# Altium PCB Copy of BabyConditionMonitor.PcbDoc
Units mm, origin at the board's own origin, x right, y up, seen from the top; angles counter-clockwise.
Board outline 40.15 x 20.15 mm, 2 copper layers (Top Layer, Bottom Layer), stack 0.791 mm thick; 50 components, 43 nets, 234 pads, 28 vias.
Unrouted connection lines stored in the file: 60.
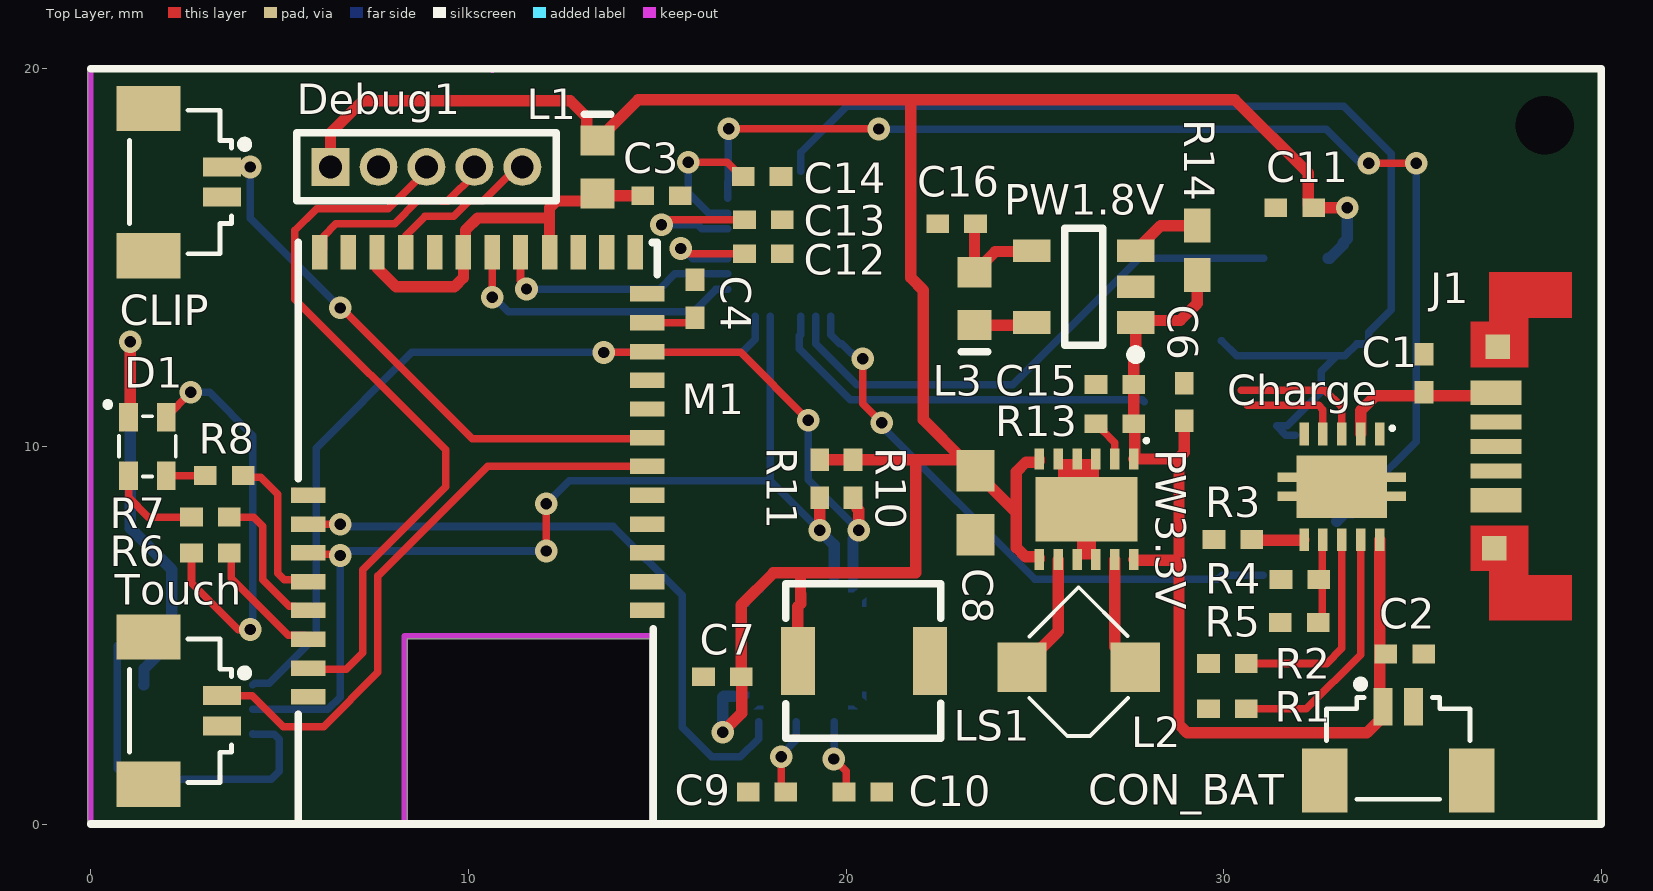
[diagram p0: Top Layer view]
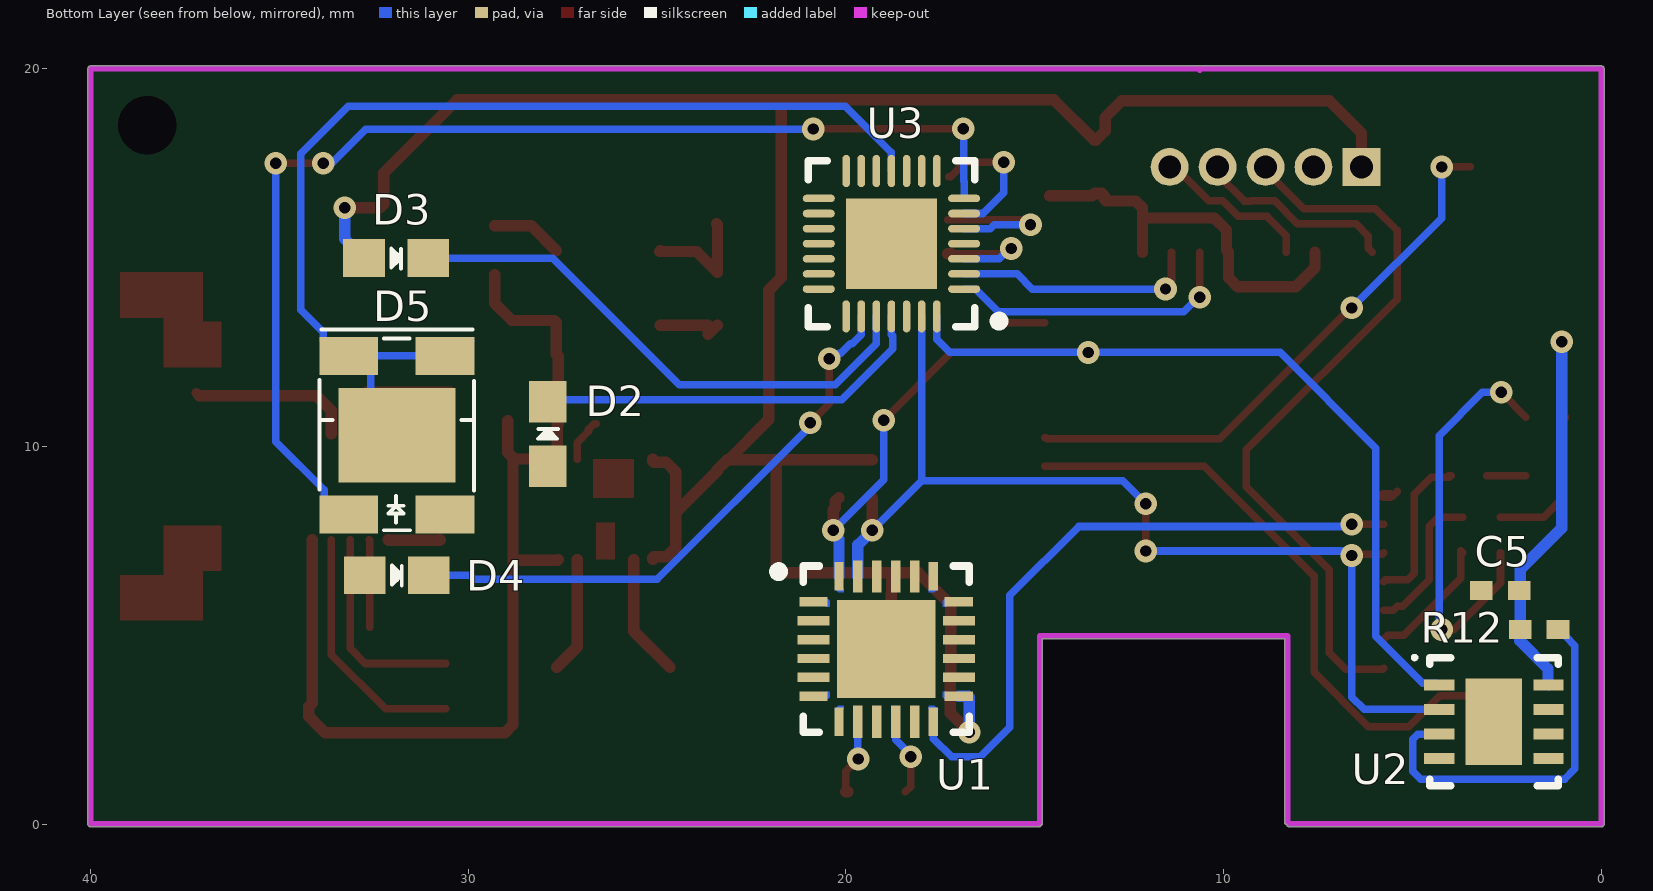
[diagram p1: Bottom Layer view, seen from below]

## Layer stack, top to bottom
Top Solder: solder mask 0.0102, Solder Resist, Dk 3.5
Top Layer: signal copper 0.0356
Dielectric 1: dielectric 0.72, FR-4, Dk 4.8
Bottom Layer: signal copper 0.0356
Bottom Solder: solder mask 0.0102, Solder Resist, Dk 3.5

## Board outline
0,-0.075 8.255,-0.075 ccw(c8.255,0) 8.328,-0.018 ccw(c8.31,0.055) 8.385,0.055 8.385,4.905 14.798,4.905 14.798,0.027 ccw(c14.873,0.027) 14.835,-0.038 ccw(c14.9,0) 14.9,-0.075 40,-0.075 ccw(c40,0) 40.075,0 40.075,20 ccw(c40,20) 40,20.075 0,20.075 ccw(c0,20) -0.075,20 -0.075,0 ccw(c0,0)

## Design rules (kind name [scope] priority, off if disabled: settings)
Clearance [All] p1: gap=0.2 ignorepadtopadclearanceinfootprint=FALSE
PolygonConnect [All] p1: connectstyle=Relief reliefconductorwidth=0.254 reliefentries=4 polygonreliefangle="90 Angle" airgapwidth=0.254
RoomDefinition BabyConditionMonitor [InComponentClass('BabyConditionMonitor')] p1: confinementstyle=ConfineOut formatcopy=TRUE lockcomponents=FALSE outline -17.907,-42.545 192.024,-42.545 192.024,-23.622 -17.907,-23.622
RoutingVias [All] p1: holewidth=0.711 width=1.27 viastyle="Through Hole" minholewidth=0.3 minwidth=0.3 maxholewidth=0.711 maxwidth=1.27
SolderMaskExpansion [All] p1: expansion=0.102
Width [All] p1: maxlimit=0.3 minlimit=0.2 preferedwidth=0.254
30 further rules are at their usual default settings.

## Components (designator, comment, footprint, x,y, rotation, side; value= is the part's Value field where it differs from the comment)
C1 "Cap" "1005[0402] High Density" 35.306,11.938 r90 top value=1uF
C2 "Cap" "1005[0402] High Density" 34.798,4.5 r0 top value=1uF
C3 "Cap" "1005[0402] High Density" 15.113,16.637 r180 top value=1uF
C4 "Cap" "1005[0402] High Density" 16.006,13.911 r270 top value=1uF
C5 "Cap" "1005[0402] High Density" 2.675,6.183 r180 bottom value=0.1uF
C6 "Cap" "1005[0402] High Density" 28.956,11.176 r270 top value=10uF
C7 "Cap" "1005[0402] High Density" 16.726,3.9 r0 top value=0.1uF
C8 "Cap" 1608[0603] 23.429,8.509 r270 top value=22uF
C9 "Cap" "1005[0402] High Density" 17.907,0.85 r0 top value=0.47uF
C10 "Cap" "1005[0402] High Density" 20.447,0.85 r180 top value=0.01uF
C11 "Cap" "1005[0402] High Density" 31.885,16.32 r0 top value=1uF
C12 "Cap" "1005[0402] High Density" 17.81,15.1 r180 top value=0.1uF
C13 "Cap" "1005[0402] High Density" 17.81,16.002 r180 top value=1uF
C14 "Cap" "1005[0402] High Density" 17.78,17.145 r180 top value=0.1uF
C15 "Cap" "1005[0402] High Density" 27.119,11.638 r0 top value=4.7uF
C16 "Cap" "1005[0402] High Density" 22.929,15.896 r0 top value=10uF
Charge "USB Charger" BQ24020 33.131,8.93 r270 top
CLIP "SM02B-SURS-TF" SM02B-SURS-TF 2.5,17 r270 top locked
CON_BAT "SM02B-SURS-TF" SM02B-SURS-TF 34.625,2.128 r0 top
D1 "FullColorLED" "fullColorLED SMT" 1.5,10 r90 top locked
D2 "LED" "1608[0603] -LED" 27.9,10.33 r90 bottom locked
D3 "LED" "1608[0603] -LED" 31.914,14.986 r180 bottom locked
D4 "LED" "1608[0603] -LED" 31.894,6.59 r180 bottom locked
D5 "VEMD5010X01" "OPT Sensor VEMD5010X01" 31.894,10.295 r180 bottom locked
Debug1 "Header 5" MHDR1X5 6.35,17.4 r0 top
J1 "USB 2.0 CON" "MicroUSB WaterProof" 37.211,10 r270 top locked
L1 "Inductor" INDC1608L 13.413,17.4 r270 top value=300Ohm100MHz
L2 "PowerInductor" Powerinductor 26.162,4.15 r225 top value=2.2uH
L3 "Inductor" INDC1608L 23.404,13.911 r90 top value=2.2uH
LS1 "Buzzer" ST-0402T 18.725,4.318 r0 top
M1 "CYBLE-224110-00" CYBLE-224110-00 5.5,0 r180 top locked
PW1.8V "LM3671" "LM3671 SOT" 26.296,14.23 r180 top
PW3.3V "Buck Boost Converter" RP604x 26.369,8.336 r270 top
R1 "Res3" "1005[0402] High Density" 30.098,3.053 r0 top value=10K
R2 "Res3" "1005[0402] High Density" 30.099,4.25 r0 top value=100K
R3 "Res3" "1005[0402] High Density" 30.244,7.53 r0 top value=10K
R4 "Res3" "1005[0402] High Density" 32.021,6.477 r180 top value=100K(DNI)
R5 "Res3" "1005[0402] High Density" 32.004,5.334 r0 top value=100K
R6 "Res3" "1005[0402] High Density" 3.167,7.18 r0 top value=330
R7 "Res3" "1005[0402] High Density" 3.167,8.128 r0 top value=330
R8 "Res3" "1005[0402] High Density" 3.536,9.225 r0 top value=330
R10 "Res3" "1005[0402] High Density" 20.185,9.144 r270 top value=4.7K
R11 "Res3" "1005[0402] High Density" 19.304,9.144 r270 top value=4.7K
R12 "Res Semi" "1005[0402] High Density" 1.644,5.15 r180 bottom value=4.7K
R13 "Res3" "1005[0402] High Density" 27.119,10.6 r0 top value=100K
R14 "" 1005[0402] 29.306,15.195 r270 top value=10K
Touch "SM02B-SURS-TF" SM02B-SURS-TF 2.5,3 r270 top locked
U1 "Accel Gyro Sensor" MPU-6050 18.935,4.633 r180 bottom locked
U2 "Body Temperature Sensor" MAX30205 2.842,2.708 r180 bottom
U3 "HRM AFE" ADPD1080 18.796,15.367 r0 bottom locked

## Footprints (in the part's own frame and the unit in brackets; to place one, negate y for a bottom-side part, rotate by r counter-clockwise, add the part's x,y. Pads: shape width x height; smd on the part's side, far side on the other; paste and mask are expansions set on the pad)
1005[0402] [mm] "Chip Resistor; Body 1.1 x 0.5 mm (LxW typ)"
  rect 0.9x0.7 smd: 1(-0.65,0) 2(0.65,0)
  body extent -0.64,-0.24 0.64,0.26, height 0.3
"1005[0402] High Density" [mm] "Chip Body 1.0x0.5mm, IPC High Density"
  rect 0.6x0.5 smd: 1(-0.5,0) 2(0.5,0)
  body extent -0.68,-0.25 0.6,0.25, height 0.3
1608[0603] [mm] "Chip Capacitor; Body 1.6 x 0.8 mm (LxW typ)"
  rect 1.1x1 smd: 1(-0.85,0) 2(0.85,0)
"1608[0603] -LED" [mm] "Chip Capacitor; Body 1.6 x 0.8 mm (LxW typ)"
  rect 1.1x1 smd: 1(-0.85,0) 2(0.85,0)
  silkscreen extent -0.13,-0.28 0.13,0.25, body extent -1.08,-0.42 1.05,0.41, height 0.6
ADPD1080 [mm] "QFN, 28-Leads, Body 4.00x4.00mm, Pitch 0.40mm, Thermal Pad 2.60x2.60mm, IPC Medium Density"
  oval 0.85x0.2 smd: 1(-1.925,1.2) 2(-1.925,0.8) 3(-1.925,0.4) 4(-1.925,0) 5(-1.925,-0.4) 6(-1.925,-0.8) 7(-1.925,-1.2) 15(1.925,-1.2) 16(1.925,-0.8) 17(1.925,-0.4) 18(1.925,0) 19(1.925,0.4) 20(1.925,0.8) 21(1.925,1.2)
  oval 0.2x0.85 smd: 8(-1.2,-1.925) 9(-0.8,-1.925) 10(-0.4,-1.925) 11(0,-1.925) 12(0.4,-1.925) 13(0.8,-1.925) 14(1.2,-1.925) 22(1.2,1.925) 23(0.8,1.925) 24(0.4,1.925) 25(0,1.925) 26(-0.4,1.925) 27(-0.8,1.925) 28(-1.2,1.925)
  rect 2.4x2.4 smd: 29(0,0)
  silkscreen extent -2.97,-2.2 2.2,2.2, body extent -2.07,-2.07 2.07,2.07, height 0.8
BQ24020 [mm] "BATTERY CHARGER"
  rect 0.6x0.25 smd: 1(-1.4,1) 2(-1.4,0.5) 3(-1.4,0) 4(-1.4,-0.5) 5(-1.4,-1) 6(1.4,-1) 7(1.4,-0.5) 8(1.4,0) 9(1.4,0.5) 10(1.4,1)
  rect 0.25x1 smd: 11(-0.25,1.2) 11(-0.25,-1.2) 11(0.25,1.2) 11(0.25,-1.2)
  rect 1.65x2.4 smd: 11(0,0)
  silkscreen extent -1.6,1.29 -1.5,1.39, body extent -1.05,-1.05 1.05,1.05, height 1
CYBLE-224110-00 [mm]
  rect 0.91x0.41 smd: 1(-0.26,-3.37) 2(-0.26,-4.13) 3(-0.26,-4.89) 4(-0.26,-5.66) 5(-0.26,-6.42) 6(-0.26,-7.18) 7(-0.26,-7.94) 8(-0.26,-8.7) 21(-9.24,-14.04) 22(-9.24,-13.28) 23(-9.24,-12.51) 24(-9.24,-11.75) 25(-9.24,-10.99) 26(-9.24,-10.23) 27(-9.24,-9.47) 28(-9.24,-8.7) 29(-9.24,-7.94) 30(-9.24,-7.18) 31(-9.24,-6.42) 32(-9.24,-5.66)
  rect 0.41x0.91 smd: 9(-0.56,-15.14) 10(-1.32,-15.14) 11(-2.08,-15.14) 12(-2.84,-15.14) 13(-3.61,-15.14) 14(-4.37,-15.14) 15(-5.13,-15.14) 16(-5.88,-15.14) 17(-6.65,-15.14) 18(-7.41,-15.14) 19(-8.17,-15.14) 20(-8.92,-15.14)
  silkscreen extent -9.5,-15.4 0,0, body extent -9.5,-15.41 0,-0.02, height 3.75
"fullColorLED SMT" [mm] "OSTB0603C1C-A"
  rect 0.75x0.5 smd: 1(0.775,0.5) 2(0.775,-0.5) 3(-0.775,0.5) 4(-0.775,-0.5)
  silkscreen extent -0.8,-0.75 1.13,1.07, body extent -0.74,-0.62 0.74,0.67, height 0.6
INDC1608L [mm] "Chip Inductor, Body 1.6x0.8mm, IPC High Density"
  rect 0.8x0.9 smd: 1(-0.7,0) 2(0.7,0)
  silkscreen extent -1.4,-0.35 -1.4,0.35, body extent -0.87,-0.48 0.87,0.48, height 0.55
"LM3671 SOT" [mm] "SOT23 LM3671 StepDown DCDC"
  rect 1x0.6 smd: 1(-1.375,0.95) 2(-1.375,0) 3(-1.375,-0.95) 4(1.375,-0.95) 5(1.375,0.95)
  silkscreen extent -1.5,-1.55 0.5,1.92
MAX30205 [mm] "Body Temperature Sensor"
  rect 0.8x0.3 smd mask+0: 1(-1.445,0.975) 2(-1.445,0.325) 3(-1.445,-0.325) 4(-1.445,-0.975) 5(1.445,-0.975) 6(1.445,-0.325) 7(1.445,0.325) 8(1.445,0.975)
  rect 1.5x2.3 smd: 4(0,0)
  silkscreen extent -2.15,-1.7 1.7,1.75, body extent -1.55,-1.55 1.55,1.55, height 0.8
MHDR1X5 [mm] "Connector; Header; 5 Position"
  rect 1x1 hole 0.6: 1(0,0)
  round 1 hole 0.6: 2(1.27,0) 3(2.54,0) 4(3.81,0) 5(5.08,0)
  silkscreen extent -0.9,-0.9 5.98,0.9
"MicroUSB WaterProof" [mm]
  rect 0.65x0.65 smd: 0(-2.64,0.05) 0(2.7,-0.05)
  rect 0.65x1.35 smd: 1(-1.425,0) 5(1.425,0)
  rect 0.4x1.35 smd: 2(-0.65,0) 3(0,0) 4(0.65,0)
  Top Layer region: 2,-0.69
  Top Layer region: 2.1,-0.67 3.3,-0.67 3.3,-0.17 4.61,-0.17 4.61,2.01 3.41,2.01 3.41,0.86 2.1,0.86
  Top Layer region: 2.1,-0.67 3.3,-0.67 3.3,-0.17 4.61,-0.17 4.61,2.01 3.41,2.01 3.41,0.86 2.1,0.86
  Top Layer region: -2.1,-0.67 -3.3,-0.67 -3.3,-0.17 -4.61,-0.17 -4.61,2.01 -3.41,2.01 -3.41,0.86 -2.1,0.86
  body extent -5.75,0 5.75,6.15, height 4.12
MPU-6050 [mm] "QFN, 24-Leads, Body 4.00x4.00mm, Pitch 0.50mm, Thermal Pad 2.60x2.60mm, IPC Medium Density"
  rect 0.75x0.25 smd: 1(-1.925,1.25) 6(-1.925,-1.25) 13(1.925,-1.25) 18(1.925,1.25)
  rect 0.85x0.25 smd: 2(-1.925,0.75) 3(-1.925,0.25) 4(-1.925,-0.25) 5(-1.925,-0.75) 14(1.925,-0.75) 15(1.925,-0.25) 16(1.925,0.25) 17(1.925,0.75)
  rect 0.25x0.75 smd: 7(-1.25,-1.925) 12(1.25,-1.925) 19(1.25,1.925) 24(-1.25,1.925)
  rect 0.25x0.85 smd: 8(-0.75,-1.925) 9(-0.25,-1.925) 10(0.25,-1.925) 11(0.75,-1.925) 20(0.75,1.925) 21(0.25,1.925) 22(-0.25,1.925) 23(-0.75,1.925)
  rect 2.6x2.6 smd: 25(0,0)
  Top Layer region: -1.375,1.6 -1.275,1.5 -1.125,1.5 -1.125,1.6
  Top Layer region: -1.6,1.375 -1.5,1.275 -1.5,1.125 -1.6,1.125
  Top Layer region: 1.6,1.375 1.5,1.275 1.5,1.125 1.6,1.125
  Top Layer region: 1.6,-1.125 1.5,-1.125 1.5,-1.275 1.6,-1.375
  Top Layer region: 1.375,-1.6 1.275,-1.5 1.125,-1.5 1.125,-1.6
  Top Layer region: -1.375,-1.6 -1.275,-1.5 -1.125,-1.5 -1.125,-1.6
  Top Layer region: -1.6,-1.375 -1.5,-1.275 -1.5,-1.125 -1.6,-1.125
  Top Layer region: 1.125,1.6 1.375,1.6 1.275,1.5 1.125,1.5
  silkscreen extent -2.98,-2.2 2.2,2.2, body extent -2.05,-2.05 2.05,2.05, height 0.95
"OPT Sensor VEMD5010X01" [mm]
  rect 1.55x1 smd: 1(-1.275,-2.1) 2(-1.275,2.1) 2(1.275,2.1) ""(1.275,-2.1)
  rect 3.1x2.5 smd: 2(0,0)
  silkscreen extent -2.05,-2.51 2.05,2.8, body extent -2.06,-2.51 2.03,2.76, height 2.05
Powerinductor [mm] "CDRH2D14"
  rect 1.3x1.3 smd rot 45: 1(-1.06,1.06) 2(1.06,-1.06)
  silkscreen extent -1.5,-1.5 1.5,1.5
RP604x [mm] "SON, 12-Leads, Body 3.00x2.70mm, Pitch 0.50mm, Thermal Pad 2.70x1.70mm, IPC High Density"
  rect 0.55x0.25 smd mask+0: 1(-1.33,1.25) 2(-1.33,0.75) 3(-1.33,0.25) 4(-1.33,-0.25) 5(-1.33,-0.75) 6(-1.33,-1.25) 7(1.33,-1.25) 8(1.33,-0.75) 9(1.33,-0.25) 10(1.33,0.25) 11(1.33,0.75) 12(1.33,1.25)
  rect 1.7x2.7 smd: 10(0,0)
  silkscreen extent -1.87,1.54 -1.77,1.64, body extent -1.38,-1.53 1.38,1.53, height 0.58
SM02B-SURS-TF [mm]
  rect 0.5x1 smd: 1(-0.4,0.975) 2(0.4,0.975)
  rect 1.2x1.7 smd: Pad(-1.95,-0.975) Pad(1.95,-0.975)
  silkscreen extent -1.9,-1.47 1.9,1.68
ST-0402T [mm] "Buzzer SMC"
  rect 0.9x1.8 smd: 1A(0,0) 2A(3.5,0)
  silkscreen extent -0.32,-2.05 3.79,2.05, body extent -0.32,-2.05 3.79,2.05, height 2

## Part data
C1 C2 C3 C4 C5 C6 C7 C8 C9 C10 C11 C12 C13 C14 C15 C16: "Capacitor", LatestRevisionDate=17-Jul-2002, LatestRevisionNote="Re-released for DXP Platform.", PackageDescription="Radial Cap, Thru-Hole; 2 Leads; 0.3 in Pin Spacing", PackageReference=RAD-0.3, Published=8-Jun-2000, Publisher="Altium Limited"
Charge: library part BQ2402X, PartNo=BQ24020
D1: PartNo=OSTB0603C1C-A
D2 D3 D4: "LED SMD"
Debug1: "Header, 5-Pin", LatestRevisionDate=17-Jul-2002, LatestRevisionNote="Re-released for DXP Platform.", Publisher="Altium Limited"
J1: library part USBConnector, "USB2.0 Connector", Manufacture=Molex, PartNo=1051640001, ComponentLink1Description="Manufacturer Link", ComponentLink1URL=http://www.molex.com/, ComponentLink2Description=Datasheet, ComponentLink2URL=http://www.molex.com/pdm_docs/sd/5000750517_sd.pdf, DatasheetVersion="rev0, Mar-2004", PackageDescription="USB Mini-B, Type 2, Thru-Hole; 5 Position; Vertical, Body 7.7 x 4.2 x 7.7 mm (LxWxH)", PackageReference=5000750517, PackageVersion="rev0, Mar-2004", PCB_Layout="Complies with Manufacturer's Recommendation.", Published=30-May-2008, Publisher="Altium Limited"
L2: Manufacture=Sumida, PartNo=CDRH2D14NP-2R2NC
L3: Manufacture=Abracon-LLC, PartNo=ASMPH-0603-2R2M-T, Code_IEC=1005, Code_JEITA=0402, LatestRevisionDate=29-May-2009, LatestRevisionNote="IPC-7351 Footprint Added.", PackageDescription="Chip Inductor", PackageReference=0402-A, Published=8-Jun-2000, Publisher="Altium Limited"
LS1: "Magnetic Transducer Buzzer", Supplier Part Number 1=433-1110-1-ND, ComponentLink1Description="Manufacturer Link", ComponentLink1URL=http://www.megastar.com/linecard/buzzmode/index.php, DatasheetVersion=17-Dec-2003, LatestRevisionDate=17-Dec-2003, LatestRevisionNote="Schematic revised, PCB Footprint replaced.", PackageDescription="Magnetic Transducer Buzzer", PackageReference=ABSM-1574, Published=24-Mar-1999, Publisher="Altium Limited", Supplier 1=Digi-Key
M1: "BLE Module Long Range"
PW1.8V: "StepDownDCDC", Manufacture="Texas Instruments", PartNo=LM3671
PW3.3V: library part RP604x, Manufacture=Ricoh, PartNo=RP604K331A
R1 R2 R3 R4 R5 R6 R7 R8 R10 R11 R13: "Resistor", LatestRevisionDate=29-May-2009, LatestRevisionNote="IPC-7351 Footprint Added.", PackageDescription="Chip Resistor", PackageReference=J1-0603, Published=8-Jun-2000, Publisher="Altium Limited"
R12: "Semiconductor Resistor", LatestRevisionDate=17-Jul-2002, LatestRevisionNote="Re-released for DXP Platform.", PackageReference=AXIAL-0.5, Published=8-Jun-2000, Publisher="Altium Limited"
R14: library part Res3, "Resistor", LatestRevisionDate=29-May-2009, LatestRevisionNote="IPC-7351 Footprint Added.", PackageDescription="Chip Resistor", PackageReference=J1-0603, Published=8-Jun-2000, Publisher="Altium Limited"
U1: library part MPU-6050, Manufacture="TDK InvenSense", PartNo=ICM-20689
U2: library part MAX30205, "Body Temperature Sebsor", Manufature=Maxim, PartNo=MAX30205
U3: library part ADPD1080, Manufacturer="Analog Devices", Manufacturer Part Number=ADPD1080BCPZ, Supplier Part Number 1=ADPD1080BCPZ-ND, Pricing 1="1 = 6.55000, 10 = 5.91300, 100 = 4.89500, 500 = 4.26250, 1000 = 3.71250 (USD)", Stock 1=338, Supplier 1=Digi-Key
L1: Code_IEC=1005, Code_JEITA=0402, LatestRevisionDate=29-May-2009, LatestRevisionNote="IPC-7351 Footprint Added.", PackageDescription="Chip Inductor", PackageReference=0402-A, Published=8-Jun-2000, Publisher="Altium Limited"

## Free pads (board coordinates)
  round 0.6 hole 1.55: 6(38.5,18.5)

## Via types
v1: diameter 0.6, hole 0.3, Top Layer to Bottom Layer, tented both sides, 28 vias

## Nets (pads, with @x,y where several pads share a name; then routed paths per layer and width w, separated by ;. In a path a pad name is that pad's centre, name@x,y a point inside that pad or via, vN(x,y) a via of type N, cw(c..) or ccw(c..) an arc to the next point about the centre after c; other vN are vias at no path point)
ACCEL_INT: M1.7 U1.12 | length 17.2
  Top Layer w0.2: M1.7 v1(6.604,7.94)
  Bottom Layer w0.2: v1(6.604,7.94) 6.666,7.878 13.839,7.878 15.665,6.052 15.665,2.564 16.451,1.778 17.204,1.778 17.685,2.259 U1.12
ACCEL_SCL: M1.6 R11.2 U1.23 U2.2 U3.27 | length 28.5
  Top Layer w0.2: M1.6 5.794,7.146 6.57,7.146 v1(6.604,7.112) ; v1(12.065,7.23) v1(12.065,8.478)
  Top Layer w0.3: v1(19.304,7.781) R11.2
  Bottom Layer w0.2: U2.2 6.28,3.033 6.604,3.357 v1(6.604,7.112) 6.681,7.189 6.82,7.189 6.861,7.23 v1(12.065,7.23) ; v1(12.065,8.478) 12.676,9.089 17.996,9.089 ; U3.27 17.996,9.089 ; v1(19.304,7.781) 17.996,9.089
  Bottom Layer w0.3: v1(19.304,7.781) 19.304,7.772 19.685,7.391 U1.23
ACCEL_SDA: M1.23 R10.2 U1.24 U2.1 U3.28 | length 32.5
  Top Layer w0.2: v1(13.589,12.488) 17.211,12.488 v1(19.004,10.695)
  Top Layer w0.3: R10.2 20.285,8.544 20.285,8.369 20.336,8.318 v1(20.336,7.781)
  Bottom Layer w0.2: U2.1 4.337,3.733 4.726,3.733 5.969,4.976 5.969,9.953 8.504,12.488 v1(13.589,12.488) 17.247,12.488 17.596,12.837 U3.28 ; v1(19.004,10.695) 19.004,9.113 v1(20.336,7.781)
  Bottom Layer w0.3: U1.24 20.185,7.549 20.336,7.7 v1(20.336,7.781)
EN_1.8V: PW1.8V.3 R14.1 | length 1.9
  Top Layer w0.3: PW1.8V.3 28.336,15.845 R14.1
NetC3_2: C3.2 L1.2 M1.11 M1.14 M1.17 | length 10.6
  Top Layer w0.3: M1.11 7.58,14.732 8.088,14.224 9.625,14.224 9.87,14.469 M1.14 9.925,15.195 9.925,15.728 10.247,16.05 12.071,16.05 12.15,16.129 ; M1.17 12.15,16.129 ; C3.2 14.5,16.637 13.476,16.637 L1.2 13.226,16.7 13.163,16.637 13.163,16.55 13.113,16.5 12.33,16.5 12.15,16.32 12.15,16.129
NetC4_2: C4.2 M1.22 | length 1.3
  Top Layer w0.2: M1.22 15.875,13.28 C4.2
NetC9_2: C9.2 U1.10 | length 2.1
  Top Layer w0.2: v1(18.288,1.778) 18.288,0.989 C9.2@18.427,0.85
  Bottom Layer w0.2: v1(18.288,1.778) 18.288,1.821 18.28,1.829 18.685,2.234 U1.10
NetC13_2: C13.2 U3.5 | length 4.1
  Top Layer w0.2: v1(15.113,15.867) 15.221,15.867 15.356,16.002 C13.2
  Bottom Layer w0.2: v1(15.113,15.867) 15.121,15.875 16.071,15.875 16.179,15.767 U3.5
NetCharge_3: Charge.3 M1.30 | length 3.6
  Top Layer w0.2: 30.467,11.492 32.685,11.492 33.131,11.046 Charge.3
NetCharge_4: Charge.4 M1.31 | length 2.7
  Top Layer w0.2: 30.633,11.092 32.514,11.092 32.631,10.975 Charge.4
NetCharge_6: Charge.6 R3.2 | length 1.4
  Top Layer w0.3: R3.2 30.761,7.513 32.114,7.513 Charge.6
NetCharge_7: Charge.7 R4.1 R5.2 | length 2.3
  Top Layer w0.2: R5.2@32.614,5.211 32.614,5.45 32.614,6.336 32.614,7.513 Charge.7
NetCharge_8: Charge.8 M1.29 R2.2 | length 5.6
  Top Layer w0.2: R2.2 32.729,4.25 33.131,4.652 Charge.8
NetCharge_9: Charge.9 R1.2 | length 6.7
  Top Layer w0.2: R1.2 30.603,3.048 32.193,3.048 33.631,4.486 Charge.9
NetCLIP_1: CLIP.1 M1.26 | length 15
  Top Layer w0.2: CLIP.1 v1(4.225,17.399) ; v1(6.604,13.667) 6.637,13.667 10.101,10.203 14.673,10.203 14.7,10.23 M1.26
  Bottom Layer w0.2: v1(4.225,17.399) 4.225,16.046 v1(6.604,13.667)
NetD1_2: D1.2 R6.1 | length 11.1
  Top Layer w0.2: D1.2 1.998,10.777 1.994,10.777 v1(2.647,11.43) ; R6.1 2.667,6.386 3.903,5.15 v1(4.225,5.15)
  Bottom Layer w0.2: v1(2.647,11.43) 3.146,11.43 4.29,10.286 4.29,5.215 v1(4.225,5.15)
NetD1_3: D1.3 R7.1 | length 2.5
  Top Layer w0.2: D1.3 1,8.652 1.524,8.128 2.487,8.128 R7.1
NetD1_4: D1.4 R8.1 | length 1
  Top Layer w0.2: D1.4 R8.1
NetD2_2: D2.2 U3.25 | length 10.6
  Bottom Layer w0.2: U3.25 18.796,12.951 18.768,12.923 18.768,12.584 20.114,11.238 27.842,11.238 D2.2
NetD3_2: D3.2 U3.24 | length 14.4
  Bottom Layer w0.2: U3.24 19.196,12.721 20.279,11.638 24.413,11.638 27.761,14.986 D3.2
NetD4_2: D4.2 U3.23 | length 15.4
  Top Layer w0.2: v1(20.447,12.319) 20.447,11.126 v1(20.947,10.626)
  Bottom Layer w0.2: U3.23 19.596,12.951 19.83,12.717 19.886,12.717 20.141,12.462 20.196,12.462 20.339,12.319 v1(20.447,12.319) ; v1(20.947,10.626) 20.947,10.535 25.005,6.477 29.845,6.477 29.958,6.59 D4.2
NetD5_1: D5.1 U3.7 | length 30.9
  Top Layer w0.2: v1(16.891,18.415) 20.81,18.415 20.821,18.404 v1(20.866,18.404) ; v1(33.84,17.495) v1(35.098,17.495)
  Bottom Layer w0.2: U3.7 16.871,17.009 16.88,17.018 16.88,18.404 v1(16.891,18.415) ; v1(20.866,18.404) 32.715,18.404 33.624,17.495 v1(33.84,17.495) ; D5.1 33.419,8.195 33.819,8.595 33.819,8.845 35.098,10.124 v1(35.098,17.495)
  Bottom Layer w0.3: D5.1@32.994,8.02 D5.1
NetD5_2: D5.2 U3.11 | length 29.9
  Bottom Layer w0.2: U3.11 18.796,17.783 20.017,19.004 33.18,19.004 34.44,17.744 34.44,13.623 33.84,13.023 33.84,12.795 33.756,12.711 33.528,12.711 33.212,12.395 33.169,12.395 D5.2@32.991,12.395 ; D5.2@29.944,12.795 30.344,12.395 30.619,12.395 D5.2@32.991,12.395 ; D5.2@31.894,10.295 31.65,10.295 31.404,10.541 31.687,10.541 32.591,11.445 32.591,11.995 D5.2@32.991,12.395
NetL2_1: L2.1 PW3.3V.11 | length 3.1
  Top Layer w0.3: PW3.3V.11 27.119,4.692 L2.1
NetL2_2: L2.2 PW3.3V.8 | length 3.3
  Top Layer w0.3: L2.2 25.619,5.106 PW3.3V.8
NetL3_1: L3.1 PW1.8V.5 | length 1.9
  Top Layer w0.3: L3.1 23.654,12.961 23.654,13.211 PW1.8V.5@24.921,13.211
NetLS1_2: LS1.2A M1.8 | length 0.4
  Top Layer w0.2: M1.8@5.405,8.805 5.51,8.7 M1.8@5.588,8.7
  Top Layer w0.3: M1.8@5.588,8.7 M1.8
NetM1_3: M1.3 R6.2 | length 3.5
  Top Layer w0.2: R6.2 3.667,7.189 3.717,7.239 3.717,6.507 5.229,4.995 5.655,4.995 M1.3
NetM1_4: M1.4 R7.2 | length 3.9
  Top Layer w0.2: R7.2 4.313,8.128 4.553,7.888 4.553,6.47 5.258,5.765 5.405,5.765 5.51,5.66 M1.4
NetM1_5: M1.5 R8.2 | length 4.2
  Top Layer w0.2: R8.2 3.976,9.225 4.021,9.18 4.501,9.18 4.953,8.728 4.953,6.636 5.122,6.466 5.714,6.466 M1.5
NetM1_15: M1.15 U3.1 | length 7.8
  Top Layer w0.2: M1.15 10.634,15.136 v1(10.634,13.951)
  Bottom Layer w0.2: v1(10.634,13.951) 10.667,13.951 11.051,13.567 15.962,13.567 16.546,14.151 16.546,14.167 U3.1
NetM1_16: M1.16 U3.2 | length 6.5
  Top Layer w0.2: M1.16 11.38,14.385 11.54,14.225 v1(11.54,14.167)
  Bottom Layer w0.2: v1(11.54,14.167) 15.062,14.167 15.462,14.567 U3.2
NetM1_27: M1.27 Touch.1 | length 16
  Top Layer w0.2: Touch.1 4.275,3.4 5.095,2.58 6.169,2.58 7.604,4.015 7.604,6.567 10.507,9.47 M1.27
NetR12_2: R12.2 U2.3 | length 10
  Bottom Layer w0.2: R12.2@1.124,5.15 1.094,5.15 0.944,5 0.944,4.97 0.697,4.723 0.697,1.459 0.973,1.183 4.778,1.183 4.992,1.397 4.992,2.241 4.856,2.377 4.293,2.377 U2.3
  Bottom Layer w0.3: R12.2@1.124,5.15 R12.2
PW_3.3V_CONTROL: PW3.3V.2 R13.1 | length 1.2
  Top Layer w0.2: R13.1 26.669,10.6 26.819,10.45 26.819,10.4 27.119,10.1 PW3.3V.2
SWDCK: Debug1.4 M1.9 | length 5.4
  Top Layer w0.2: M1.9 6.165,15.245 6.165,15.569 6.491,15.895 8.046,15.895 8.651,16.5 9.271,16.5 9.281,16.49 9.446,16.49 10.195,17.239 10.16,17.274 Debug1.4
SWDIO: Debug1.5 M1.12 | length 4.3
  Top Layer w0.2: M1.12 8.34,15.579 8.851,16.09 9.612,16.09 10.022,16.5 10.391,16.5 11.291,17.4 Debug1.5
VCC_1.8V: C12.2 C14.2 C16.2 L3.2 PW1.8V.4 U3.3 U3.6 | length 9.9
  Top Layer w0.2: v1(15.621,15.24) 15.729,15.24 15.869,15.1 C12.2@17.21,15.1 ; v1(15.826,17.526) 16.849,17.526 17.23,17.145 C14.2
  Top Layer w0.3: C12.2@17.21,15.1 C12.2 ; C16.2 23.404,15.871 L3.2 23.956,15.163 24.938,15.163 PW1.8V.4
  Bottom Layer w0.2: v1(15.621,15.24) 15.665,15.24 15.938,14.967 U3.3 ; v1(15.826,17.526) 15.826,16.721 16.38,16.167 U3.6
VCC_BAT: C2.1 C6.2 C15.2 Charge.10 CON_BAT.1 PW1.8V.1 PW3.3V.1 PW3.3V.12 R13.2 R14.2 | length 27.2
  Top Layer w0.3: PW3.3V.12 27.64,6.985 28.818,6.985 ; C6.2 28.956,9.838 28.818,9.7 ; R14.2 29.306,13.792 28.849,13.335 27.726,13.335 PW1.8V.1 27.671,12.442 27.619,12.39 C15.2 R13.2 27.646,10.573 27.646,9.881 27.644,9.879 27.644,9.691 PW3.3V.1 28.784,9.666 28.818,9.7 ; Charge.10 34.131,3.197 CON_BAT.1 34.225,2.847 34.181,2.803 34.175,2.803 34.125,2.753 34.125,2.747 33.791,2.413 29.037,2.413 28.818,2.632 28.818,6.985 ; 28.818,6.985 28.818,9.7
VIN_5V: C1.1 Charge.2 J1.1 R4.2 | length 4.4
  Top Layer w0.254: J1.1@37.125,11.339 J1.1
  Top Layer w0.3: Charge.2 33.631,10.951 34.019,11.339 J1.1@37.125,11.339
WGND: C1.2 C2.2 C3.1 C4.1 C5.1 C6.1 C7.1 C8.2 C9.1 C10.1 C11.1 C12.1 C13.1 C14.1 C15.1 C16.1 Charge.5 Charge.11 CLIP.2 CLIP.Pad CON_BAT.2 CON_BAT.Pad Debug1.2 J1.0 J1.5 M1.1 M1.32 PW1.8V.2 PW3.3V.3 PW3.3V.4 PW3.3V.5 PW3.3V.9 PW3.3V.10 R1.1 R2.1 R3.1 R5.1 Touch.2 Touch.Pad U1.9 U1.11 U1.18 U2.4 U2.5 U2.6 U2.7 U3.4 U3.26 U3.29
WVDD: C5.2 C7.2 C8.1 C10.2 C11.2 D1.1 D2.1 D3.1 D4.1 Debug1.1 L1.1 LS1.1A PW3.3V.6 PW3.3V.7 R10.1 R11.1 R12.1 U1.8 U1.13 U2.8 | length 81.1
  Top Layer w0.2: v1(19.677,1.721) 20.007,1.391 C10.2@20.007,0.85
  Top Layer w0.3: D1.1 1.044,10.819 v1(1.044,12.767) ; Debug1.1 6.35,18.3 7.2,19.15 12.7,19.15 13.138,18.712 13.138,18.35 13.388,18.1 L1.1 ; L1.1 14.491,19.177 21.717,19.177 ; v1(16.735,2.433) 17.235,2.933 17.235,3.9 C7.2 17.226,5.799 18.077,6.65 18.796,6.65 ; LS1.1A 18.725,5.76 18.799,5.834 18.799,6.082 18.796,6.085 18.796,6.65 ; R11.1 R10.1 21.844,9.644 ; C10.2 C10.2@20.007,0.85 ; C8.1@23.412,9.342 24.511,8.243 ; C8.1 23.144,9.644 C8.1@23.11,9.644 ; PW3.3V.7 25.119,7.052 25.094,7.077 24.754,7.077 24.511,7.32 24.511,8.243 ; PW3.3V.6 25.119,9.609 25.094,9.584 24.765,9.584 24.511,9.33 24.511,8.243 ; v1(33.274,16.32) C11.2 32.34,16.32 32.24,16.42 32.24,17.239 30.302,19.177 21.717,19.177 ; 18.796,6.65 21.844,6.65 21.844,9.644 ; 21.717,19.177 21.717,14.466 22.046,14.137 22.046,10.708 C8.1@23.11,9.644 ; 21.844,9.644 C8.1@23.11,9.644
  Bottom Layer w0.2: U1.8 19.685,1.721 v1@19.746,1.66
  Bottom Layer w0.3: v1(1.044,12.767) 1.044,7.836 2.144,6.736 R12.1 2.159,5.135 2.159,4.857 1.409,4.107 1.409,3.683 U2.8 ; v1(16.735,2.433) 16.735,3.358 16.76,3.383 U1.13 ; D3.1 32.814,14.986 33.164,15.336 33.164,15.386 33.274,15.496 v1(33.274,16.32)
XRES: Debug1.3 M1.2 | length 19.6
  Top Layer w0.2: M1.2 5.79,4.1 6.767,4.1 7.204,4.537 7.204,6.733 9.398,8.927 9.398,9.906 5.405,13.899 5.405,15.717 5.983,16.295 7.88,16.295 8.89,17.305 Debug1.3
pads on no net: Charge.1 D5. J1.2 J1.3 J1.4 M1.10 M1.13 M1.18 M1.19 M1.20 M1.21 M1.24 M1.25 M1.28 U1.1 U1.2 U1.3 U1.4 U1.5 U1.6 U1.7 U1.14 U1.15 U1.16 U1.17 U1.19 U1.20 U1.21 U1.22 U1.25 U3.8 U3.9 U3.10 U3.12 U3.13 U3.14 U3.15 U3.16 U3.17 U3.18 U3.19 U3.20 U3.21 U3.22

## Keep-outs
Keep-Out Layer:
  lines w0.15: 10.6,20 10.634,19.966 10.634,20 ; 0,0 8.255,0 8.31,0.055 8.31,4.98 14.873,4.98 14.873,0.027 14.9,0 40,0 40,20 0,20 0,0

## Other copper
Top Layer:
  rectangle net WGND: 26.119,7.006 26.619,7.985
  rectangle net WGND: 25.619,8.636 26.698,9.666

## Silkscreen, mask and mechanical layers (free items; w line width, h text height)
Top Overlay:
  lines w0.2: 0,0 40,0 40,20 0,20
Mechanical 1:
  lines w0.2: 0,0 0,20